# Altium PCB TX_BK9531.PcbDoc (part 2 of 2)
Units mm, origin at the board's own origin, x right, y up, seen from the top; angles counter-clockwise.
Board outline 27.94 x 28.57 mm, 2 copper layers (Top Layer, Bottom Layer); 38 components, 26 nets, 122 pads, 33 vias.
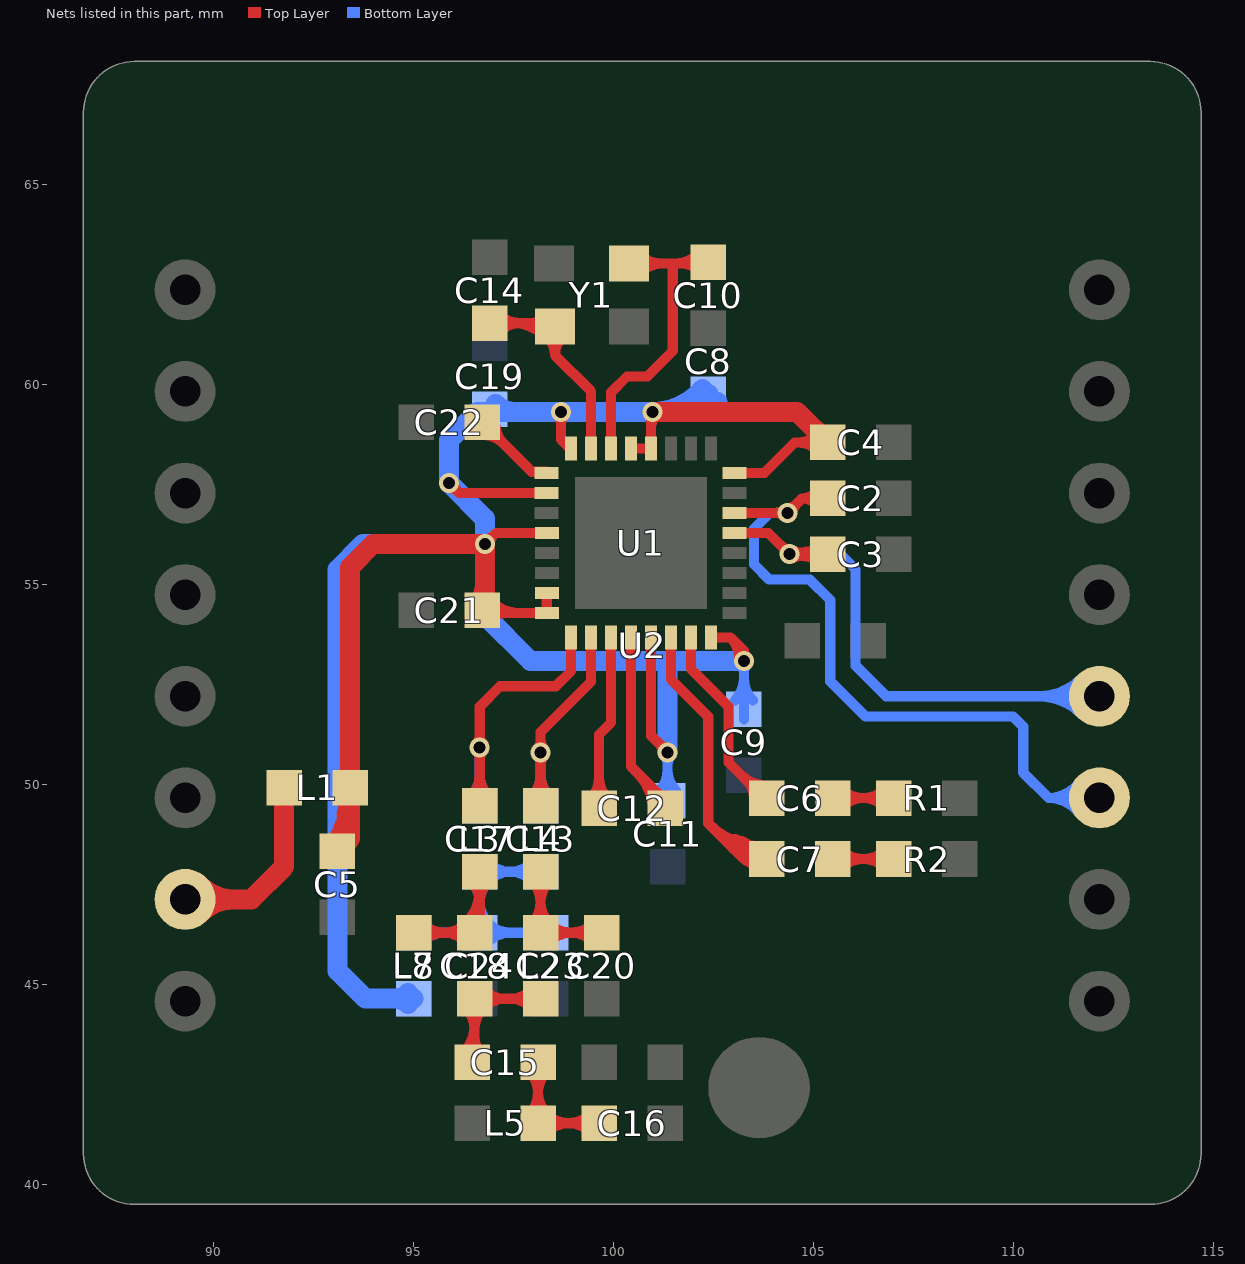
[diagram p2: the nets of this part, all layers, seen from the top]

## Via types
v1: diameter 0.5, hole 0.3, Top Layer to Bottom Layer, 33 vias

## Nets (pads, with @x,y where several pads share a name; then routed paths per layer and width w, separated by ;. In a path a pad name is that pad's centre, name@x,y a point inside that pad or via, vN(x,y) a via of type N, cw(c..) or ccw(c..) an arc to the next point about the centre after c; other vN are vias at no path point) (continued)
NetC4_1: C4.1 C5.2 C8.2 C9.2 C11.2 C19.2 C21.1 L1.2 L8.1 U1.2 U1.4 U1.7 U1.8 U1.13 U1.16 U1.24 U1.28 U1.29 U1.32 | length 118.1
  Top Layer w0.254: v1(95.885,57.531) 96.131,57.285 U1.2@98.323,57.285 ; C21.1@96.71,54.356 96.782,54.285 U1.8@98.323,54.285 U1.7@98.323,54.754 ; v1(96.774,56.007) 97.052,56.285 U1.4@98.323,56.285 ; v1(98.679,59.309) 98.679,58.618 U1.32@98.902,58.395 ; U1.29@100.433,58.395 U1.28@100.933,58.395 100.933,59.277 v1(100.965,59.309) ; U1.13@100.933,53.67 100.933,51.213 v1(101.346,50.8) ; U1.16@102.433,53.67 102.921,53.67 ; U1.24@103.022,57.785 103.759,57.785 104.521,58.547 C4.1@105.346,58.547 ; v1(103.251,53.086) 103.251,53.34 ; v1@95.885,57.408 cw(c95.885,57.111) 96.095,57.321 ; v1@95.885,57.408 cw(c95.885,57.111) 96.095,57.321 ; v1@95.885,57.408 cw(c95.885,57.111) 96.095,57.321 ; v1@96.008,57.531 ccw(c96.305,57.531) 96.095,57.321 ; v1@96.008,57.531 ccw(c96.305,57.531) 96.095,57.321 ; v1@96.008,57.531 ccw(c96.305,57.531) 96.095,57.321 ; v1@96.774,56.13 ccw(c96.774,56.427) 96.984,56.217 ; v1@96.774,56.13 ccw(c96.774,56.427) 96.984,56.217 ; v1@96.774,56.13 ccw(c96.774,56.427) 96.984,56.217 ; v1@96.897,56.007 cw(c97.194,56.007) 96.984,56.217 ; v1@96.897,56.007 cw(c97.194,56.007) 96.984,56.217 ; v1@96.897,56.007 cw(c97.194,56.007) 96.984,56.217 ; C21.1@96.935,54.131 cw(c97.306,53.761) 97.306,54.285 ; C21.1@96.935,54.131 cw(c97.306,53.761) 97.306,54.285 ; C21.1@96.935,54.131 cw(c97.306,53.761) 97.306,54.285 ; C21.1@96.935,54.581 ccw(c97.648,55.294) 97.648,54.285 ; C21.1@96.935,54.581 ccw(c97.648,55.294) 97.648,54.285 ; C21.1@96.935,54.581 ccw(c97.648,55.294) 97.648,54.285 ; v1@98.592,59.222 cw(c98.382,59.012) 98.679,59.012 ; v1@98.592,59.222 cw(c98.382,59.012) 98.679,59.012 ; v1@98.592,59.222 cw(c98.382,59.012) 98.679,59.012 ; 98.679,59.012 cw(c98.976,59.012) v1@98.766,59.222 ; 98.679,59.012 cw(c98.976,59.012) v1@98.766,59.222 ; 98.679,59.012 cw(c98.976,59.012) v1@98.766,59.222 ; 100.933,58.935 cw(c101.339,58.935) v1@101.052,59.222 ; 100.933,58.935 cw(c101.339,58.935) v1@101.052,59.222 ; 100.933,58.935 cw(c101.339,58.935) v1@101.052,59.222 ; 101.136,51.01 cw(c100.926,50.8) v1@101.223,50.8 ; 101.136,51.01 ccw(c101.346,51.22) v1@101.346,50.923 ; 101.136,51.01 cw(c100.926,50.8) v1@101.223,50.8 ; 101.136,51.01 ccw(c101.346,51.22) v1@101.346,50.923 ; 101.136,51.01 cw(c100.926,50.8) v1@101.223,50.8 ; 101.136,51.01 ccw(c101.346,51.22) v1@101.346,50.923 ; 102.921,53.67 cw(c102.412,53.162) v1@103.128,53.097 ; 102.921,53.67 cw(c102.412,53.162) v1@103.128,53.097 ; 102.921,53.67 cw(c102.412,53.162) v1@103.128,53.097 ; 102.921,53.67 103.251,53.34 ; v1@103.175,53.182 ccw(c103.05,53.34) 103.251,53.34 ; v1@103.175,53.182 ccw(c103.05,53.34) 103.251,53.34 ; v1@103.175,53.182 ccw(c103.05,53.34) 103.251,53.34 ; 103.251,53.34 ccw(c103.452,53.34) v1@103.327,53.182 ; 103.251,53.34 ccw(c103.452,53.34) v1@103.327,53.182 ; 103.251,53.34 ccw(c103.452,53.34) v1@103.327,53.182 ; 104.58,58.547 cw(c104.58,57.78) C4.1@105.122,58.322 ; 104.58,58.547 ccw(c104.58,59.314) C4.1@105.122,58.772 ; 104.58,58.547 cw(c104.58,57.78) C4.1@105.122,58.322 ; 104.58,58.547 ccw(c104.58,59.314) C4.1@105.122,58.772 ; 104.58,58.547 cw(c104.58,57.78) C4.1@105.122,58.322 ; 104.58,58.547 ccw(c104.58,59.314) C4.1@105.122,58.772
  Top Layer w0.5: C5.2@93.091,48.323 93.408,48.641 L1.2@93.408,49.911 93.408,55.435 93.98,56.007 v1(96.774,56.007) 96.774,54.419 C21.1@96.71,54.356 ; L1.2@93.24,49.814 cw(c92.564,49.424) 93.318,49.222 ; C5.2@93.268,48.403 cw(c93.929,48.701) 93.301,49.064 ; v1(100.965,59.309) 104.584,59.309 C4.1@105.346,58.547 ; L1.2@93.271,49.773 cw(c92.939,49.441) 93.408,49.441 ; L1.2@93.271,49.773 cw(c92.939,49.441) 93.408,49.441 ; L1.2@93.271,49.773 cw(c92.939,49.441) 93.408,49.441 ; L1.2@93.271,50.049 ccw(c92.939,50.381) 93.408,50.381 ; L1.2@93.271,50.049 ccw(c92.939,50.381) 93.408,50.381 ; L1.2@93.271,50.049 ccw(c92.939,50.381) 93.408,50.381 ; 93.408,49.441 cw(c93.878,49.441) L1.2@93.546,49.773 ; 93.408,49.441 cw(c93.878,49.441) L1.2@93.546,49.773 ; 93.408,49.441 cw(c93.878,49.441) L1.2@93.546,49.773 ; 93.408,50.381 ccw(c93.878,50.381) L1.2@93.546,50.049 ; 93.408,50.381 ccw(c93.878,50.381) L1.2@93.546,50.049 ; 93.408,50.381 ccw(c93.878,50.381) L1.2@93.546,50.049 ; C21.1@96.573,54.494 ccw(c96.088,54.979) 96.774,54.979 ; C21.1@96.573,54.494 ccw(c96.088,54.979) 96.774,54.979 ; C21.1@96.573,54.494 ccw(c96.088,54.979) 96.774,54.979 ; C4.1@105.014,58.879 cw(c104.682,58.547) C4.1@105.152,58.547 ; C4.1@105.014,58.879 ccw(c105.346,59.211) C4.1@105.346,58.742 ; C4.1@105.014,58.879 cw(c104.682,58.547) C4.1@105.152,58.547 ; C4.1@105.014,58.879 ccw(c105.346,59.211) C4.1@105.346,58.742 ; C4.1@105.014,58.879 cw(c104.682,58.547) C4.1@105.152,58.547 ; C4.1@105.014,58.879 ccw(c105.346,59.211) C4.1@105.346,58.742 ; C5.2@92.953,48.461 ccw(c91.855,49.56) 93.408,49.56 cw(c91.855,49.56) C5.2@92.953,48.461
  Bottom Layer w0.254: C11.2@101.346,49.593 v1(101.346,50.8) ; C9.2@103.251,51.625 v1(103.251,53.086) ; C11.2@101.121,49.818 ccw(c100.579,50.36) 101.346,50.36 ; C11.2@101.121,49.818 ccw(c100.579,50.36) 101.346,50.36 ; C11.2@101.121,49.818 ccw(c100.579,50.36) 101.346,50.36 ; v1@101.259,50.713 cw(c101.049,50.503) 101.346,50.503 ; v1@101.259,50.713 cw(c101.049,50.503) 101.346,50.503 ; v1@101.259,50.713 cw(c101.049,50.503) 101.346,50.503 ; 101.346,50.36 ccw(c102.113,50.36) C11.2@101.571,49.818 ; 101.346,50.36 ccw(c102.113,50.36) C11.2@101.571,49.818 ; 101.346,50.36 ccw(c102.113,50.36) C11.2@101.571,49.818 ; 101.346,50.503 cw(c101.643,50.503) v1@101.433,50.713 ; 101.346,50.503 cw(c101.643,50.503) v1@101.433,50.713 ; 101.346,50.503 cw(c101.643,50.503) v1@101.433,50.713 ; C9.2@103.026,52.104 ccw(c102.484,52.646) 103.251,52.646 ; C9.2@103.026,52.104 ccw(c102.484,52.646) 103.251,52.646 ; C9.2@103.026,52.104 ccw(c102.484,52.646) 103.251,52.646 ; v1@103.164,52.999 cw(c102.954,52.789) 103.251,52.789 ; v1@103.164,52.999 cw(c102.954,52.789) 103.251,52.789 ; v1@103.164,52.999 cw(c102.954,52.789) 103.251,52.789 ; 103.251,52.646 ccw(c104.018,52.646) C9.2@103.476,52.104 ; 103.251,52.646 ccw(c104.018,52.646) C9.2@103.476,52.104 ; 103.251,52.646 ccw(c104.018,52.646) C9.2@103.476,52.104 ; 103.251,52.789 cw(c103.548,52.789) v1@103.338,52.999 ; 103.251,52.789 cw(c103.548,52.789) v1@103.338,52.999 ; 103.251,52.789 cw(c103.548,52.789) v1@103.338,52.999
  Bottom Layer w0.5: L8.1@94.996,44.64 93.789,44.64 93.091,45.339 93.091,55.372 93.726,56.007 v1(96.774,56.007) ; 96.135,58.861 cw(c96.901,58.095) C19.2@96.901,59.178 ; v1(101.346,50.8) 101.346,53.086 ; C8.2@102.058,59.309 ccw(c102.058,60.016) C8.2@102.593,59.554 ; C8.2@102.215,59.881 cw(c100.965,60.961) v1(100.965,59.309) ; C8.2@102.362,59.753 101.917,59.309 v1(100.965,59.309) ; v1(103.251,53.086) 101.346,53.086 ; 94.526,44.64 cw(c94.526,44.171) L8.1@94.858,44.503 ; 94.526,44.64 ccw(c94.526,45.11) L8.1@94.858,44.778 ; 94.526,44.64 cw(c94.526,44.171) L8.1@94.858,44.503 ; 94.526,44.64 ccw(c94.526,45.11) L8.1@94.858,44.778 ; 94.526,44.64 cw(c94.526,44.171) L8.1@94.858,44.503 ; 94.526,44.64 ccw(c94.526,45.11) L8.1@94.858,44.778 ; v1(96.774,56.007) 96.774,56.642 v1(95.885,57.531) 95.885,58.61 96.584,59.309 v1(98.679,59.309) v1(100.965,59.309) ; v1(96.774,56.007) 96.774,54.229 97.917,53.086 101.346,53.086 ; C19.2@97.039,59.51 ccw(c97.524,59.995) 97.524,59.309 ; C19.2@97.039,59.51 ccw(c97.524,59.995) 97.524,59.309 ; C19.2@97.039,59.51 ccw(c97.524,59.995) 97.524,59.309
NetC6_1: C6.1 R1.1 | length 8.7
  Top Layer w0.254: C6.1@105.474,49.657 R1.1@106.998,49.657 ; C6.1@105.698,49.432 cw(c106.24,48.89) 106.24,49.657 ; C6.1@105.698,49.432 cw(c106.24,48.89) 106.24,49.657 ; C6.1@105.698,49.432 cw(c106.24,48.89) 106.24,49.657 ; C6.1@105.698,49.882 ccw(c106.24,50.424) 106.24,49.657 ; C6.1@105.698,49.882 ccw(c106.24,50.424) 106.24,49.657 ; C6.1@105.698,49.882 ccw(c106.24,50.424) 106.24,49.657 ; 106.231,49.657 cw(c106.231,48.89) R1.1@106.773,49.432 ; 106.231,49.657 ccw(c106.231,50.424) R1.1@106.773,49.882 ; 106.231,49.657 cw(c106.231,48.89) R1.1@106.773,49.432 ; 106.231,49.657 ccw(c106.231,50.424) R1.1@106.773,49.882 ; 106.231,49.657 cw(c106.231,48.89) R1.1@106.773,49.432 ; 106.231,49.657 ccw(c106.231,50.424) R1.1@106.773,49.882
NetC6_2: C6.2 U1.15 | length 7.9
  Top Layer w0.254: U1.15@101.933,53.67 101.933,52.88 102.87,51.943 102.87,50.546 C6.2@103.759,49.657 ; 103.278,50.12 cw(c103.1,49.458) C6.2@103.761,49.64 ; 103.172,50.244 ccw(c103.822,50.894) 103.822,49.974 cw(c103.822,50.894) 103.172,50.244 ; 103.325,50.091 cw(c102.892,49.657) 103.505,49.657 ccw(c102.892,49.657) 103.325,50.091
NetC7_1: C7.1 R2.1 | length 8.7
  Top Layer w0.254: C7.1@105.474,48.133 R2.1@106.998,48.133 ; C7.1@105.698,47.908 cw(c106.24,47.366) 106.24,48.133 ; C7.1@105.698,47.908 cw(c106.24,47.366) 106.24,48.133 ; C7.1@105.698,47.908 cw(c106.24,47.366) 106.24,48.133 ; C7.1@105.698,48.358 ccw(c106.24,48.9) 106.24,48.133 ; C7.1@105.698,48.358 ccw(c106.24,48.9) 106.24,48.133 ; C7.1@105.698,48.358 ccw(c106.24,48.9) 106.24,48.133 ; 106.231,48.133 cw(c106.231,47.366) R2.1@106.773,47.908 ; 106.231,48.133 ccw(c106.231,48.9) R2.1@106.773,48.358 ; 106.231,48.133 cw(c106.231,47.366) R2.1@106.773,47.908 ; 106.231,48.133 ccw(c106.231,48.9) R2.1@106.773,48.358 ; 106.231,48.133 cw(c106.231,47.366) R2.1@106.773,47.908 ; 106.231,48.133 ccw(c106.231,48.9) R2.1@106.773,48.358
NetC7_2: C7.2 U1.14 | length 18.1
  Top Layer w0.254: U1.14@101.433,53.67 101.433,52.618 102.362,51.689 102.362,49.022 ; 102.988,48.389 cw(c102.79,47.538) C7.2@103.547,47.974 ; 103.021,48.633 cw(c102.75,47.464) C7.2@103.769,48.099 ; 103.234,48.332 ccw(c103.36,48.875) C7.2@103.654,48.402 ; C7.2@103.822,48.133 103.251,48.133 ; 102.362,49.022 ccw(c103.745,50.405) 103.812,48.45 cw(c103.745,50.405) 102.362,49.022 ; 102.362,49.022 103.251,48.133 ; 103.251,48.133 cw(c103.251,47.777) C7.2@103.553,47.965 ; 103.251,48.133 ccw(c103.251,48.489) C7.2@103.553,48.301 ; 103.251,48.133 cw(c103.251,47.777) C7.2@103.553,47.965 ; 103.251,48.133 ccw(c103.251,48.489) C7.2@103.553,48.301 ; 103.251,48.133 cw(c103.251,47.777) C7.2@103.553,47.965 ; 103.251,48.133 ccw(c103.251,48.489) C7.2@103.553,48.301 ; 102.776,48.608 ccw(c103.772,49.605) 103.82,48.196 cw(c103.772,49.605) 102.776,48.608 ; 103.189,48.195 ccw(c103.8,48.805) 103.829,47.943 cw(c103.8,48.805) 103.189,48.195
NetC10_1: C10.1 U1.30 Y1.3 | length 13.6
  Top Layer w0.254: U1.30@99.933,58.395 99.933,59.801 100.33,60.198 100.838,60.198 101.473,60.833 101.473,63.017 ; Y1.3@100.381,63.017 101.473,63.017 ; C10.1@102.362,63.055 102.324,63.017 101.473,63.017 ; Y1.3@100.659,62.789 cw(c101.211,62.238) 101.211,63.017 ; Y1.3@100.659,62.789 cw(c101.211,62.238) 101.211,63.017 ; Y1.3@100.659,62.789 cw(c101.211,62.238) 101.211,63.017 ; Y1.3@100.659,63.246 ccw(c101.211,63.797) 101.211,63.017 ; Y1.3@100.659,63.246 ccw(c101.211,63.797) 101.211,63.017 ; Y1.3@100.659,63.246 ccw(c101.211,63.797) 101.211,63.017 ; 101.504,63.017 ccw(c101.504,63.914) 102.137,63.28 cw(c101.504,63.914) 101.504,63.017 ; 101.687,63.017 cw(c101.687,62.381) 102.137,62.831 ccw(c101.687,62.381) 101.687,63.017
NetC12_1: C12.1 U1.12 | length 8.8
  Top Layer w0.254: U1.12@100.433,53.67 100.433,50.443 101.282,49.593 C12.1@101.282,49.403 ; 100.795,50.039 ccw(c101.627,50.262) C12.1@101.306,49.462 ; 100.606,50.27 cw(c99.739,49.403) 100.965,49.403 ccw(c99.739,49.403) 100.606,50.27 ; C12.1@101.039,49.837 cw(c100.606,49.403) 101.219,49.403 ccw(c100.606,49.403) C12.1@101.039,49.837 ; C12.1@101.066,49.81 ccw(c101.282,50.027) 101.282,49.721 cw(c101.282,50.027) C12.1@101.066,49.81
NetC12_2: C12.2 U1.11 | length 8
  Top Layer w0.254: C12.2@99.632,49.403 99.632,51.244 99.933,51.546 U1.11@99.933,53.67 ; C12.2@99.407,49.628 ccw(c98.865,50.17) 99.632,50.17 ; C12.2@99.407,49.628 ccw(c98.865,50.17) 99.632,50.17 ; C12.2@99.407,49.628 ccw(c98.865,50.17) 99.632,50.17 ; 99.632,50.17 ccw(c100.398,50.17) C12.2@99.856,49.628 ; 99.632,50.17 ccw(c100.398,50.17) C12.2@99.856,49.628 ; 99.632,50.17 ccw(c100.398,50.17) C12.2@99.856,49.628
NetC13_1: C13.1 L4.2 U1.10 | length 17.5
  Top Layer w0.254: C13.1@98.171,49.466 v1(98.171,50.8) 98.171,51.308 99.433,52.57 U1.10@99.433,53.67 ; C13.1@97.946,49.691 ccw(c97.404,50.233) 98.171,50.233 ; C13.1@97.946,49.691 ccw(c97.404,50.233) 98.171,50.233 ; C13.1@97.946,49.691 ccw(c97.404,50.233) 98.171,50.233 ; v1@98.084,50.713 cw(c97.874,50.503) 98.171,50.503 ; v1@98.084,50.713 cw(c97.874,50.503) 98.171,50.503 ; v1@98.084,50.713 cw(c97.874,50.503) 98.171,50.503 ; v1@98.084,50.887 ccw(c97.874,51.097) 98.171,51.097 ; v1@98.084,50.887 ccw(c97.874,51.097) 98.171,51.097 ; v1@98.084,50.887 ccw(c97.874,51.097) 98.171,51.097 ; 98.171,50.233 ccw(c98.938,50.233) C13.1@98.396,49.691 ; 98.171,50.233 ccw(c98.938,50.233) C13.1@98.396,49.691 ; 98.171,50.233 ccw(c98.938,50.233) C13.1@98.396,49.691 ; 98.171,50.503 cw(c98.468,50.503) v1@98.258,50.713 ; 98.171,50.503 cw(c98.468,50.503) v1@98.258,50.713 ; 98.171,50.503 cw(c98.468,50.503) v1@98.258,50.713 ; 98.171,51.097 ccw(c98.468,51.097) v1@98.258,50.887 ; 98.171,51.097 ccw(c98.468,51.097) v1@98.258,50.887 ; 98.171,51.097 ccw(c98.468,51.097) v1@98.258,50.887
  Bottom Layer w0.254: L4.2@98.171,49.466 v1(98.171,50.8) ; L4.2@97.946,49.691 ccw(c97.404,50.233) 98.171,50.233 ; L4.2@97.946,49.691 ccw(c97.404,50.233) 98.171,50.233 ; L4.2@97.946,49.691 ccw(c97.404,50.233) 98.171,50.233 ; v1@98.084,50.713 cw(c97.874,50.503) 98.171,50.503 ; v1@98.084,50.713 cw(c97.874,50.503) 98.171,50.503 ; v1@98.084,50.713 cw(c97.874,50.503) 98.171,50.503 ; 98.171,50.233 ccw(c98.938,50.233) L4.2@98.396,49.691 ; 98.171,50.233 ccw(c98.938,50.233) L4.2@98.396,49.691 ; 98.171,50.233 ccw(c98.938,50.233) L4.2@98.396,49.691 ; 98.171,50.503 cw(c98.468,50.503) v1@98.258,50.713 ; 98.171,50.503 cw(c98.468,50.503) v1@98.258,50.713 ; 98.171,50.503 cw(c98.468,50.503) v1@98.258,50.713
NetC13_2: C13.2 C20.2 L2.2 | length 17.5
  Top Layer w0.254: C13.2@98.171,47.816 L2.2@98.171,46.291 C20.2@99.695,46.291 ; L2.2@97.946,46.516 ccw(c97.404,47.058) 98.171,47.058 ; L2.2@97.946,46.516 ccw(c97.404,47.058) 98.171,47.058 ; L2.2@97.946,46.516 ccw(c97.404,47.058) 98.171,47.058 ; C13.2@97.946,47.591 cw(c97.404,47.049) 98.171,47.049 ; C13.2@97.946,47.591 cw(c97.404,47.049) 98.171,47.049 ; C13.2@97.946,47.591 cw(c97.404,47.049) 98.171,47.049 ; 98.171,47.049 cw(c98.938,47.049) C13.2@98.396,47.591 ; 98.171,47.049 cw(c98.938,47.049) C13.2@98.396,47.591 ; 98.171,47.049 cw(c98.938,47.049) C13.2@98.396,47.591 ; 98.171,47.058 ccw(c98.938,47.058) L2.2@98.396,46.516 ; 98.171,47.058 ccw(c98.938,47.058) L2.2@98.396,46.516 ; 98.171,47.058 ccw(c98.938,47.058) L2.2@98.396,46.516 ; L2.2@98.396,46.067 cw(c98.938,45.525) 98.938,46.291 ; L2.2@98.396,46.067 cw(c98.938,45.525) 98.938,46.291 ; L2.2@98.396,46.067 cw(c98.938,45.525) 98.938,46.291 ; L2.2@98.396,46.516 ccw(c98.938,47.058) 98.938,46.291 ; L2.2@98.396,46.516 ccw(c98.938,47.058) 98.938,46.291 ; L2.2@98.396,46.516 ccw(c98.938,47.058) 98.938,46.291 ; 98.928,46.291 cw(c98.928,45.525) C20.2@99.47,46.067 ; 98.928,46.291 ccw(c98.928,47.058) C20.2@99.47,46.516 ; 98.928,46.291 cw(c98.928,45.525) C20.2@99.47,46.067 ; 98.928,46.291 ccw(c98.928,47.058) C20.2@99.47,46.516 ; 98.928,46.291 cw(c98.928,45.525) C20.2@99.47,46.067 ; 98.928,46.291 ccw(c98.928,47.058) C20.2@99.47,46.516
NetC14_1: C14.1 U1.31 Y1.1 | length 14.3
  Top Layer w0.254: C14.1@96.901,61.531 98.438,61.531 Y1.1@98.527,61.443 98.527,60.731 ; U1.31@99.433,58.395 99.433,59.825 98.527,60.731 ; C14.1@97.126,61.307 cw(c97.668,60.765) 97.668,61.531 ; C14.1@97.126,61.307 cw(c97.668,60.765) 97.668,61.531 ; C14.1@97.126,61.307 cw(c97.668,60.765) 97.668,61.531 ; C14.1@97.126,61.756 ccw(c97.668,62.298) 97.668,61.531 ; C14.1@97.126,61.756 ccw(c97.668,62.298) 97.668,61.531 ; C14.1@97.126,61.756 ccw(c97.668,62.298) 97.668,61.531 ; Y1.1@98.314,61.199 cw(c97.905,60.731) 98.527,60.731 ; Y1.1@98.314,61.199 cw(c97.905,60.731) 98.527,60.731 ; Y1.1@98.314,61.199 cw(c97.905,60.731) 98.527,60.731 ; 98.527,60.731 cw(c99.148,60.731) Y1.1@98.739,61.199 ; 98.527,60.731 cw(c99.148,60.731) Y1.1@98.739,61.199 ; 98.527,60.731 cw(c99.148,60.731) Y1.1@98.739,61.199 ; 97.482,61.531 cw(c97.482,60.448) 98.248,61.214 ccw(c97.482,60.448) 97.482,61.531 ; 97.911,61.531 ccw(c97.911,62.008) 98.248,61.671 cw(c97.911,62.008) 97.911,61.531
NetC15_1: C15.1 C16.2 L5.2 | length 17.5
  Top Layer w0.254: C15.1@98.108,43.053 L5.2@98.108,41.529 C16.2@99.632,41.529 ; L5.2@97.883,41.754 ccw(c97.341,42.296) 98.108,42.296 ; L5.2@97.883,41.754 ccw(c97.341,42.296) 98.108,42.296 ; L5.2@97.883,41.754 ccw(c97.341,42.296) 98.108,42.296 ; C15.1@97.883,42.828 cw(c97.341,42.286) 98.108,42.286 ; C15.1@97.883,42.828 cw(c97.341,42.286) 98.108,42.286 ; C15.1@97.883,42.828 cw(c97.341,42.286) 98.108,42.286 ; 98.108,42.286 cw(c98.874,42.286) C15.1@98.332,42.828 ; 98.108,42.286 cw(c98.874,42.286) C15.1@98.332,42.828 ; 98.108,42.286 cw(c98.874,42.286) C15.1@98.332,42.828 ; 98.108,42.296 ccw(c98.874,42.296) L5.2@98.332,41.754 ; 98.108,42.296 ccw(c98.874,42.296) L5.2@98.332,41.754 ; 98.108,42.296 ccw(c98.874,42.296) L5.2@98.332,41.754 ; L5.2@98.332,41.304 cw(c98.874,40.762) 98.874,41.529 ; L5.2@98.332,41.304 cw(c98.874,40.762) 98.874,41.529 ; L5.2@98.332,41.304 cw(c98.874,40.762) 98.874,41.529 ; L5.2@98.332,41.754 ccw(c98.874,42.296) 98.874,41.529 ; L5.2@98.332,41.754 ccw(c98.874,42.296) 98.874,41.529 ; L5.2@98.332,41.754 ccw(c98.874,42.296) 98.874,41.529 ; 98.865,41.529 cw(c98.865,40.762) C16.2@99.407,41.304 ; 98.865,41.529 ccw(c98.865,42.296) C16.2@99.407,41.754 ; 98.865,41.529 cw(c98.865,40.762) C16.2@99.407,41.304 ; 98.865,41.529 ccw(c98.865,42.296) C16.2@99.407,41.754 ; 98.865,41.529 cw(c98.865,40.762) C16.2@99.407,41.304 ; 98.865,41.529 ccw(c98.865,42.296) C16.2@99.407,41.754
NetC15_2: C15.2 C18.1 L2.1 | length 16.5
  Top Layer w0.254: C15.2@96.456,43.053 96.52,43.116 C18.1@96.52,44.64 L2.1@98.171,44.64 ; C18.1@96.295,44.416 cw(c95.753,43.874) 96.52,43.874 ; C18.1@96.295,44.416 cw(c95.753,43.874) 96.52,43.874 ; C18.1@96.295,44.416 cw(c95.753,43.874) 96.52,43.874 ; 96.52,43.874 cw(c97.287,43.874) C18.1@96.745,44.416 ; 96.52,43.874 cw(c97.287,43.874) C18.1@96.745,44.416 ; 96.52,43.874 cw(c97.287,43.874) C18.1@96.745,44.416 ; C18.1@96.745,44.416 cw(c97.287,43.874) 97.287,44.64 ; C18.1@96.745,44.416 cw(c97.287,43.874) 97.287,44.64 ; C18.1@96.745,44.416 cw(c97.287,43.874) 97.287,44.64 ; C18.1@96.745,44.865 ccw(c97.287,45.407) 97.287,44.64 ; C18.1@96.745,44.865 ccw(c97.287,45.407) 97.287,44.64 ; C18.1@96.745,44.865 ccw(c97.287,45.407) 97.287,44.64 ; 97.404,44.64 cw(c97.404,43.874) L2.1@97.946,44.416 ; 97.404,44.64 ccw(c97.404,45.407) L2.1@97.946,44.865 ; 97.404,44.64 cw(c97.404,43.874) L2.1@97.946,44.416 ; 97.404,44.64 ccw(c97.404,45.407) L2.1@97.946,44.865 ; 97.404,44.64 cw(c97.404,43.874) L2.1@97.946,44.416 ; 97.404,44.64 ccw(c97.404,45.407) L2.1@97.946,44.865 ; C15.2@96.232,43.278 ccw(c95.537,43.973) 96.52,43.973 cw(c95.537,43.973) C15.2@96.232,43.278 ; 96.52,43.666 ccw(c97.07,43.666) 96.681,43.278 cw(c97.07,43.666) 96.52,43.666
NetC17_1: C17.1 L3.2 U1.9 | length 18.9
  Top Layer w0.254: C17.1@96.647,49.466 v1(96.647,50.927) 96.647,51.943 97.155,52.451 98.552,52.451 98.933,52.832 U1.9@98.933,53.67 ; C17.1@96.422,49.691 ccw(c95.88,50.233) 96.647,50.233 ; C17.1@96.422,49.691 ccw(c95.88,50.233) 96.647,50.233 ; C17.1@96.422,49.691 ccw(c95.88,50.233) 96.647,50.233 ; v1@96.56,50.84 cw(c96.35,50.63) 96.647,50.63 ; v1@96.56,50.84 cw(c96.35,50.63) 96.647,50.63 ; v1@96.56,50.84 cw(c96.35,50.63) 96.647,50.63 ; v1@96.56,51.014 ccw(c96.35,51.224) 96.647,51.224 ; v1@96.56,51.014 ccw(c96.35,51.224) 96.647,51.224 ; v1@96.56,51.014 ccw(c96.35,51.224) 96.647,51.224 ; 96.647,50.233 ccw(c97.414,50.233) C17.1@96.872,49.691 ; 96.647,50.233 ccw(c97.414,50.233) C17.1@96.872,49.691 ; 96.647,50.233 ccw(c97.414,50.233) C17.1@96.872,49.691 ; 96.647,50.63 cw(c96.944,50.63) v1@96.734,50.84 ; 96.647,50.63 cw(c96.944,50.63) v1@96.734,50.84 ; 96.647,50.63 cw(c96.944,50.63) v1@96.734,50.84 ; 96.647,51.224 ccw(c96.944,51.224) v1@96.734,51.014 ; 96.647,51.224 ccw(c96.944,51.224) v1@96.734,51.014 ; 96.647,51.224 ccw(c96.944,51.224) v1@96.734,51.014
  Bottom Layer w0.254: L3.2@96.647,49.466 v1(96.647,50.927) ; L3.2@96.422,49.691 ccw(c95.88,50.233) 96.647,50.233 ; L3.2@96.422,49.691 ccw(c95.88,50.233) 96.647,50.233 ; L3.2@96.422,49.691 ccw(c95.88,50.233) 96.647,50.233 ; v1@96.56,50.84 cw(c96.35,50.63) 96.647,50.63 ; v1@96.56,50.84 cw(c96.35,50.63) 96.647,50.63 ; v1@96.56,50.84 cw(c96.35,50.63) 96.647,50.63 ; 96.647,50.233 ccw(c97.414,50.233) L3.2@96.872,49.691 ; 96.647,50.233 ccw(c97.414,50.233) L3.2@96.872,49.691 ; 96.647,50.233 ccw(c97.414,50.233) L3.2@96.872,49.691 ; 96.647,50.63 cw(c96.944,50.63) v1@96.734,50.84 ; 96.647,50.63 cw(c96.944,50.63) v1@96.734,50.84 ; 96.647,50.63 cw(c96.944,50.63) v1@96.734,50.84
NetC17_2: C17.2 C18.2 L7.2 | length 17.3
  Top Layer w0.254: L7.2@94.996,46.291 C18.2@96.52,46.291 96.647,46.419 C17.2@96.647,47.816 ; L7.2@95.221,46.067 cw(c95.763,45.525) 95.763,46.291 ; L7.2@95.221,46.067 cw(c95.763,45.525) 95.763,46.291 ; L7.2@95.221,46.067 cw(c95.763,45.525) 95.763,46.291 ; L7.2@95.221,46.516 ccw(c95.763,47.058) 95.763,46.291 ; L7.2@95.221,46.516 ccw(c95.763,47.058) 95.763,46.291 ; L7.2@95.221,46.516 ccw(c95.763,47.058) 95.763,46.291 ; 95.753,46.291 cw(c95.753,45.525) C18.2@96.295,46.067 ; 95.753,46.291 ccw(c95.753,47.058) C18.2@96.295,46.516 ; 95.753,46.291 cw(c95.753,45.525) C18.2@96.295,46.067 ; 95.753,46.291 ccw(c95.753,47.058) C18.2@96.295,46.516 ; 95.753,46.291 cw(c95.753,45.525) C18.2@96.295,46.067 ; 95.753,46.291 ccw(c95.753,47.058) C18.2@96.295,46.516 ; C18.2@96.295,46.516 ccw(c95.447,47.365) 96.647,47.365 cw(c95.447,47.365) C18.2@96.295,46.516 ; C17.2@96.422,47.591 cw(c95.88,47.049) 96.647,47.049 ; C17.2@96.422,47.591 cw(c95.88,47.049) 96.647,47.049 ; C17.2@96.422,47.591 cw(c95.88,47.049) 96.647,47.049 ; 96.647,46.751 cw(c96.06,46.751) 96.475,46.336 ccw(c96.06,46.751) 96.647,46.751 ; 96.647,46.751 ccw(c96.98,46.751) 96.745,46.516 cw(c96.98,46.751) 96.647,46.751 ; 96.647,47.049 cw(c97.414,47.049) C17.2@96.872,47.591 ; 96.647,47.049 cw(c97.414,47.049) C17.2@96.872,47.591 ; 96.647,47.049 cw(c97.414,47.049) C17.2@96.872,47.591
NetC22_1: C22.1 U1.1 | length 4.5
  Top Layer w0.254: C22.1@96.71,59.055 97.949,57.816 U1.1@98.323,57.816 ; 97.253,58.513 cw(c97.795,59.055) 97.028,59.055 ccw(c97.795,59.055) 97.253,58.513 ; 97.253,58.513 ccw(c96.71,57.971) 96.71,58.737 cw(c96.71,57.971) 97.253,58.513
NetC23_1: C23.1 C24.1 L3.1 L4.1 L8.2 | length 35.4
  Bottom Layer w0.254: L8.2@94.996,46.291 C24.1@96.647,46.291 ; L4.1@98.171,47.816 L3.1@96.647,47.816 C24.1@96.647,46.291 ; C23.1@98.425,46.291 C24.1@96.647,46.291 ; L8.2@95.221,46.067 cw(c95.763,45.525) 95.763,46.291 ; L8.2@95.221,46.067 cw(c95.763,45.525) 95.763,46.291 ; L8.2@95.221,46.067 cw(c95.763,45.525) 95.763,46.291 ; L8.2@95.221,46.516 ccw(c95.763,47.058) 95.763,46.291 ; L8.2@95.221,46.516 ccw(c95.763,47.058) 95.763,46.291 ; L8.2@95.221,46.516 ccw(c95.763,47.058) 95.763,46.291 ; 95.88,46.291 cw(c95.88,45.525) C24.1@96.422,46.067 ; 95.88,46.291 ccw(c95.88,47.058) C24.1@96.422,46.516 ; 95.88,46.291 cw(c95.88,45.525) C24.1@96.422,46.067 ; 95.88,46.291 ccw(c95.88,47.058) C24.1@96.422,46.516 ; 95.88,46.291 cw(c95.88,45.525) C24.1@96.422,46.067 ; 95.88,46.291 ccw(c95.88,47.058) C24.1@96.422,46.516 ; C24.1@96.422,46.516 ccw(c95.88,47.058) 96.647,47.058 ; C24.1@96.422,46.516 ccw(c95.88,47.058) 96.647,47.058 ; C24.1@96.422,46.516 ccw(c95.88,47.058) 96.647,47.058 ; L3.1@96.422,47.591 cw(c95.88,47.049) 96.647,47.049 ; L3.1@96.422,47.591 cw(c95.88,47.049) 96.647,47.049 ; L3.1@96.422,47.591 cw(c95.88,47.049) 96.647,47.049 ; 96.647,47.049 cw(c97.414,47.049) L3.1@96.872,47.591 ; 96.647,47.049 cw(c97.414,47.049) L3.1@96.872,47.591 ; 96.647,47.049 cw(c97.414,47.049) L3.1@96.872,47.591 ; 96.647,47.058 ccw(c97.414,47.058) C24.1@96.872,46.516 ; 96.647,47.058 ccw(c97.414,47.058) C24.1@96.872,46.516 ; 96.647,47.058 ccw(c97.414,47.058) C24.1@96.872,46.516 ; C24.1@96.872,46.067 cw(c97.414,45.525) 97.414,46.291 ; C24.1@96.872,46.067 cw(c97.414,45.525) 97.414,46.291 ; C24.1@96.872,46.067 cw(c97.414,45.525) 97.414,46.291 ; C24.1@96.872,46.516 ccw(c97.414,47.058) 97.414,46.291 ; C24.1@96.872,46.516 ccw(c97.414,47.058) 97.414,46.291 ; C24.1@96.872,46.516 ccw(c97.414,47.058) 97.414,46.291 ; L3.1@96.872,47.591 cw(c97.414,47.049) 97.414,47.816 ; L3.1@96.872,47.591 cw(c97.414,47.049) 97.414,47.816 ; L3.1@96.872,47.591 cw(c97.414,47.049) 97.414,47.816 ; L3.1@96.872,48.04 ccw(c97.414,48.582) 97.414,47.816 ; L3.1@96.872,48.04 ccw(c97.414,48.582) 97.414,47.816 ; L3.1@96.872,48.04 ccw(c97.414,48.582) 97.414,47.816 ; 97.404,47.816 cw(c97.404,47.049) L4.1@97.946,47.591 ; 97.404,47.816 ccw(c97.404,48.582) L4.1@97.946,48.04 ; 97.404,47.816 cw(c97.404,47.049) L4.1@97.946,47.591 ; 97.404,47.816 ccw(c97.404,48.582) L4.1@97.946,48.04 ; 97.404,47.816 cw(c97.404,47.049) L4.1@97.946,47.591 ; 97.404,47.816 ccw(c97.404,48.582) L4.1@97.946,48.04 ; 97.658,46.291 cw(c97.658,45.525) C23.1@98.2,46.067 ; 97.658,46.291 ccw(c97.658,47.058) C23.1@98.2,46.516 ; 97.658,46.291 cw(c97.658,45.525) C23.1@98.2,46.067 ; 97.658,46.291 ccw(c97.658,47.058) C23.1@98.2,46.516 ; 97.658,46.291 cw(c97.658,45.525) C23.1@98.2,46.067 ; 97.658,46.291 ccw(c97.658,47.058) C23.1@98.2,46.516
SCK: C3.2 U1.21 U2.4 | length 29.2
  Top Layer w0.254: U1.21@103.022,56.285 103.862,56.285 v1(104.394,55.753) C3.2@105.346,55.753 ; 104.184,55.963 cw(c103.974,55.753) v1@104.271,55.753 ; 104.184,55.963 ccw(c104.394,56.173) v1@104.394,55.876 ; 104.184,55.963 cw(c103.974,55.753) v1@104.271,55.753 ; 104.184,55.963 ccw(c104.394,56.173) v1@104.394,55.876 ; 104.184,55.963 cw(c103.974,55.753) v1@104.271,55.753 ; 104.184,55.963 ccw(c104.394,56.173) v1@104.394,55.876 ; v1@104.456,55.646 cw(c104.686,55.247) 104.806,55.693 ; v1@104.456,55.646 cw(c104.686,55.247) 104.806,55.693 ; v1@104.456,55.646 cw(c104.686,55.247) 104.806,55.693 ; v1@104.456,55.646 cw(c104.686,55.247) 104.806,55.693 ; v1@104.456,55.646 cw(c104.686,55.247) 104.806,55.693 ; v1@104.456,55.646 cw(c104.686,55.247) 104.806,55.693 ; v1@104.456,55.86 ccw(c104.686,56.259) 104.806,55.813 ; v1@104.456,55.86 ccw(c104.686,56.259) 104.806,55.813 ; v1@104.456,55.86 ccw(c104.686,56.259) 104.806,55.813 ; v1@104.456,55.86 ccw(c104.686,56.259) 104.806,55.813 ; v1@104.456,55.86 ccw(c104.686,56.259) 104.806,55.813 ; v1@104.456,55.86 ccw(c104.686,56.259) 104.806,55.813 ; v1@104.481,55.666 cw(c104.691,55.456) 104.691,55.753 ; v1@104.481,55.666 cw(c104.691,55.456) 104.691,55.753 ; v1@104.481,55.666 cw(c104.691,55.456) 104.691,55.753 ; v1@104.481,55.84 ccw(c104.691,56.05) 104.691,55.753 ; v1@104.481,55.84 ccw(c104.691,56.05) 104.691,55.753 ; v1@104.481,55.84 ccw(c104.691,56.05) 104.691,55.753 ; v1@104.58,55.753 cw(c104.58,54.986) C3.2@105.122,55.528 ; v1@104.58,55.753 ccw(c104.58,56.52) C3.2@105.122,55.978 ; v1@104.58,55.753 cw(c104.58,54.986) C3.2@105.122,55.528 ; v1@104.58,55.753 ccw(c104.58,56.52) C3.2@105.122,55.978 ; v1@104.58,55.753 cw(c104.58,54.986) C3.2@105.122,55.528 ; v1@104.58,55.753 ccw(c104.58,56.52) C3.2@105.122,55.978
  Bottom Layer w0.254: v1(104.394,55.753) 105.664,55.753 106.045,55.372 106.045,52.964 106.807,52.202 U2.4@112.141,52.202 ; U2.4@111.692,51.753 ccw(c110.608,50.669) 110.608,52.202 ccw(c110.608,53.735) U2.4@111.692,52.651 ; U2.4@111.872,51.933 ccw(c111.221,51.282) 111.221,52.202 ccw(c111.221,53.122) U2.4@111.872,52.471 ; v1@104.481,55.666 cw(c104.691,55.456) 104.691,55.753 ; v1@104.481,55.666 cw(c104.691,55.456) 104.691,55.753 ; v1@104.481,55.666 cw(c104.691,55.456) 104.691,55.753 ; v1@104.481,55.84 ccw(c104.691,56.05) 104.691,55.753 ; v1@104.481,55.84 ccw(c104.691,56.05) 104.691,55.753 ; v1@104.481,55.84 ccw(c104.691,56.05) 104.691,55.753
SDA: C2.2 U1.22 U2.3 | length 27
  Top Layer w0.254: U1.22@103.022,56.785 v1(104.346,56.785) 104.712,57.15 ; C2.2@105.346,57.15 104.712,57.15 ; 104.05,56.785 cw(c104.05,56.488) v1@104.26,56.698 ; 104.05,56.785 ccw(c104.05,57.082) v1@104.26,56.872 ; 104.05,56.785 cw(c104.05,56.488) v1@104.26,56.698 ; 104.05,56.785 ccw(c104.05,57.082) v1@104.26,56.872 ; 104.05,56.785 cw(c104.05,56.488) v1@104.26,56.698 ; 104.05,56.785 ccw(c104.05,57.082) v1@104.26,56.872 ; v1@104.346,56.908 ccw(c104.346,57.205) 104.556,56.995 ; v1@104.346,56.908 ccw(c104.346,57.205) 104.556,56.995 ; v1@104.346,56.908 ccw(c104.346,57.205) 104.556,56.995 ; v1@104.469,56.785 cw(c104.766,56.785) 104.556,56.995 ; v1@104.469,56.785 cw(c104.766,56.785) 104.556,56.995 ; v1@104.469,56.785 cw(c104.766,56.785) 104.556,56.995 ; 104.712,57.15 cw(c104.712,56.674) C2.2@105.092,56.96 ; 104.712,57.15 ccw(c104.712,57.626) C2.2@105.092,57.34 ; 104.712,57.15 cw(c104.712,56.674) C2.2@105.092,56.96 ; 104.712,57.15 ccw(c104.712,57.626) C2.2@105.092,57.34 ; 104.712,57.15 cw(c104.712,56.674) C2.2@105.092,56.96 ; 104.712,57.15 ccw(c104.712,57.626) C2.2@105.092,57.34
  Bottom Layer w0.254: v1(104.346,56.785) 103.902,56.785 103.505,56.388 103.505,55.499 103.886,55.118 104.902,55.118 105.41,54.61 105.41,52.578 106.294,51.694 109.982,51.694 110.236,51.44 110.236,50.292 110.866,49.662 ; U2.3@111.634,49.279 ccw(c110.866,48.7) 110.866,49.662 ; U2.3@111.634,50.045 cw(c110.866,50.624) 110.866,49.662 ; U2.3@111.837,49.432 ccw(c111.376,49.085) 111.376,49.662 ccw(c111.376,50.239) U2.3@111.837,49.892 ; U2.3@112.141,49.662 110.866,49.662 ; 104.05,56.785 cw(c104.05,56.488) v1@104.26,56.698 ; 104.05,56.785 ccw(c104.05,57.082) v1@104.26,56.872 ; 104.05,56.785 cw(c104.05,56.488) v1@104.26,56.698 ; 104.05,56.785 ccw(c104.05,57.082) v1@104.26,56.872 ; 104.05,56.785 cw(c104.05,56.488) v1@104.26,56.698 ; 104.05,56.785 ccw(c104.05,57.082) v1@104.26,56.872
VCC2.8: L1.1 U2.15 | length 10.9
  Top Layer w0.5: U2.15@89.281,47.122 90.937,47.122 91.757,47.942 L1.1@91.757,49.911 ; 90.517,47.122 cw(c90.517,48.358) 89.643,47.484 ccw(c90.517,48.358) 90.517,47.122 ; 90.517,47.122 ccw(c90.517,45.886) 89.643,46.76 cw(c90.517,45.886) 90.517,47.122 ; L1.1@91.62,49.773 cw(c91.288,49.441) 91.757,49.441 ; L1.1@91.62,49.773 cw(c91.288,49.441) 91.757,49.441 ; L1.1@91.62,49.773 cw(c91.288,49.441) 91.757,49.441 ; 91.757,49.441 cw(c92.227,49.441) L1.1@91.895,49.773 ; 91.757,49.441 cw(c92.227,49.441) L1.1@91.895,49.773 ; 91.757,49.441 cw(c92.227,49.441) L1.1@91.895,49.773
pads on no net: U1.5 U1.6 U1.18 U1.19 U1.20 U1.23 U1.25 U1.26 U1.27 U2.1 U2.2 U2.5 U2.6 U2.10 U2.11 U2.12 U2.13 U2.14

## Polygon pours and split planes (outlines as drawn)
GND on Bottom Layer "Bottom Layer-No Net" (solid, pour order 6): 86.741,46.482 86.741,42.545 86.741,40.612 86.752,40.601 87.856,39.497 88.011,39.497 113.922,39.497 114.419,39.994 114.681,40.256 114.681,41.529 114.681,67.191 113.897,67.975 113.8,68.072 112.141,68.072 87.622,68.072 86.838,67.288 86.741,67.191 86.741,65.659
GND on Top Layer "Bottom Layer-No Net" (solid, pour order 8): 86.741,56.007 86.774,55.974 86.774,40.435 87.679,39.53 87.712,39.497 89.662,39.497 113.8,39.497 114.584,40.281 114.681,40.378 114.681,41.656 114.681,67.101 113.743,68.039 113.71,68.072 112.014,68.072 87.622,68.072 86.838,67.288

## Keep-outs
Keep-Out Layer:
  the board outline again, w0.254

## Silkscreen, mask and mechanical layers (free items; w line width, h text height)
Top Overlay:
  lines w0.254: 87.884,61.214 90.424,61.214 ; 90.297,43.053 90.424,43.053 ; 110.871,40.64 113.284,43.053 113.411,43.053 ; 110.871,61.214 113.411,61.214 ; 90.424,43.053 87.884,43.053 87.884,63.627 90.424,63.627 90.424,43.053 ; 113.411,43.053 113.411,63.627 110.871,63.627 110.871,43.053 113.411,43.053
  text "MICP/PWM" at 106.807,62.103 h0.5
  text "AN/CE" at 90.678,61.976 h0.5
  text "MICN/INT" at 106.934,59.563 h0.5
  text "RST" at 90.805,59.436 h0.5
  text "CS" at 90.805,57.023 h0.5
  text "RX" at 109.22,56.896 h0.5
  text "SCK" at 90.805,54.61 h0.5
  text "TX" at 109.22,54.483 h0.5
  text "MISO" at 90.805,52.07 h0.5
  text "SCL" at 109.22,51.943 h0.5
  text "MOSI" at 90.805,50.8 h0.5
  text "SDA" at 109.347,49.403 h0.5
  text "+5V" at 109.22,46.736 h0.5
  text "+3.3V" at 90.17,46.609 h0.5
  text "GND" at 90.805,44.323 h0.5
  text "GND" at 109.22,44.323 h0.5

## Text inside footprints (layer, text, board x,y; h text height)
U2: Top Overlay "Mikro Bus" at 95.25,65.913 h1.2